# Altium PCB ESP32DIV2-Shield-pcb.PcbDoc
Units mm, origin at the board's own origin, x right, y up, seen from the top; angles counter-clockwise.
Board outline 53.59 x 100.96 mm, 2 copper layers (Top Layer, Bottom Layer); 34 components, 35 nets, 171 pads, 49 vias.
Unrouted connection lines stored in the file: 1.
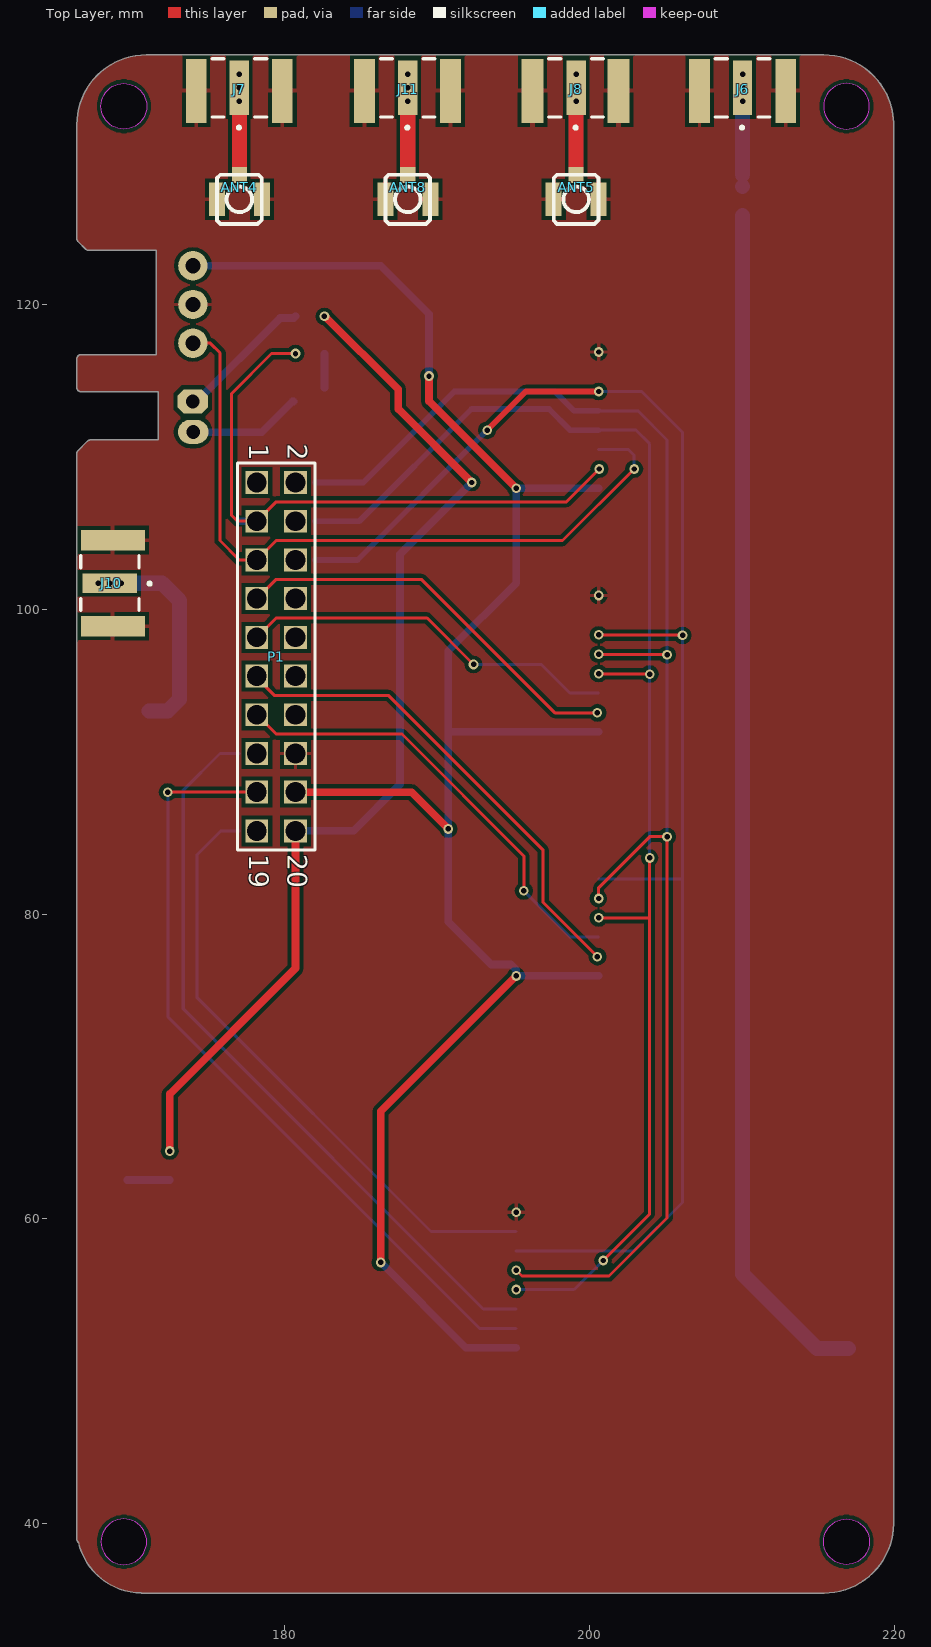
[diagram p0: Top Layer view]
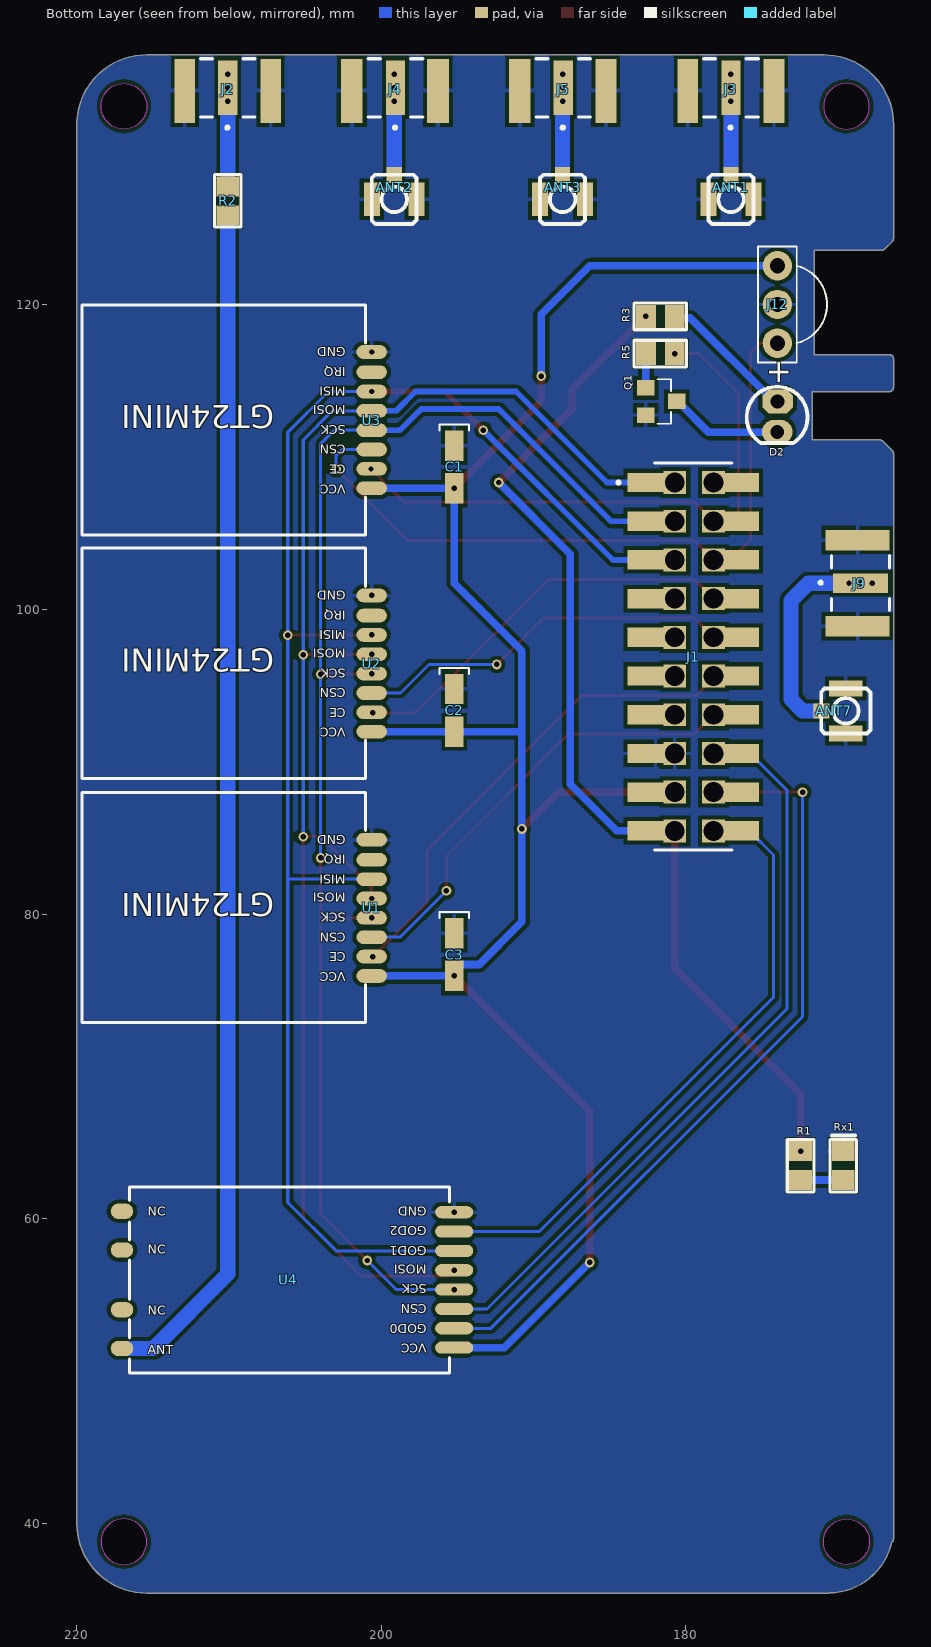
[diagram p1: Bottom Layer view, seen from below]

## Layer stack, top to bottom
Top Solder: solder mask 0.0102, Solder Resist, Dk 3.5
Top Layer: signal copper 0.0356
Dielectric 1: dielectric 0.32, FR-4, Dk 4.8
Bottom Layer: signal copper 0.0356
Bottom Solder: solder mask 0.0102, Solder Resist, Dk 3.5

## Board outline
166.37,38.989 166.37,110.236 cw(c166.624,110.236) 166.445,110.417 166.444,110.416 167.079,111.051 cw(c167.259,110.871) 167.259,111.125 171.704,111.125 171.704,114.3 166.624,114.3 cw(c166.624,114.554) 166.37,114.554 166.37,116.459 cw(c166.624,116.459) 166.624,116.713 171.577,116.713 171.577,123.571 167.132,123.571 cw(c167.132,123.825) 166.952,123.645 166.444,124.153 cw(c166.624,124.333) 166.37,124.333 166.37,131.826 cw(c170.942,131.826) 170.937,136.398 cw(c170.942,136.144) 170.942,136.398 215.392,136.398 cw(c215.392,136.144) 215.393,136.398 ccw(c215.392,131.826) 215.392,136.398 215.393,136.398 cw(c215.392,131.826) 219.952,132.157 cw(c219.71,132.08) 219.964,132.08 219.964,40.016 cw(c219.71,40.016) 219.964,40.011 ccw(c215.392,40.016) 219.964,40.016 219.964,40.011 cw(c215.392,40.016) 215.394,35.443 cw(c215.392,35.698) 215.392,35.443 170.666,35.443 cw(c170.666,35.698) 170.588,35.456 cw(c170.666,39.751) 166.481,38.779 cw(c166.624,38.989)
cut-out: 216.877,40.32 cw(c216.877,38.82) 218.377,38.82 cw(c216.877,38.82) 216.877,37.32 cw(c216.877,38.82) 215.377,38.82 cw(c216.877,38.82)
cut-out: 169.457,40.32 ccw(c169.457,38.82) 167.957,38.82 ccw(c169.457,38.82) 169.457,37.32 ccw(c169.457,38.82) 170.957,38.82 ccw(c169.457,38.82)
cut-out: 169.457,131.522 cw(c169.457,133.022) 167.957,133.022 cw(c169.457,133.022) 169.457,134.522 cw(c169.457,133.022) 170.957,133.022 cw(c169.457,133.022)
cut-out: 216.877,131.522 ccw(c216.877,133.022) 218.377,133.022 ccw(c216.877,133.022) 216.877,134.522 ccw(c216.877,133.022) 215.377,133.022 ccw(c216.877,133.022)

## Design rules (kind name [scope] priority, off if disabled: settings)
Clearance [All] p1: gap=0.254 ignorepadtopadclearanceinfootprint=FALSE except(0: Arc-Hole Track-Hole SMDPad-Hole THPad-Hole Via-Hole Fill-Hole Poly-Hole Region-Hole Text-Hole)
PolygonConnect [All] p1: connectstyle=Relief reliefconductorwidth=0.254 reliefentries=4 polygonreliefangle="90 Angle" airgapwidth=0.254
RoutingVias [All] p1: holewidth=0.711 width=1.27 viastyle="Through Hole" minholewidth=0.711 minwidth=1.27 maxholewidth=0.711 maxwidth=1.27
SolderMaskExpansion [All] p1: expansion=0.102 istentingtop=FALSE
Width [All] p1: maxlimit=1 minlimit=0.2 preferedwidth=0.5 minimp=50.000000 maximp=50.000000 favimp=50.000000
30 further rules are at their usual default settings.

## Components (designator, comment, footprint, x,y, rotation, side; value= is the part's Value field where it differs from the comment)
ANT1 "ANT U.FL" "U.FL SMD" 177.036,127.724 r0 bottom
ANT2 "ANT U.FL" "U.FL SMD" 199.134,127.724 r0 bottom
ANT3 "ANT U.FL" "U.FL SMD" 188.085,127.724 r0 bottom
ANT4 "ANT U.FL" "U.FL SMD" 177.04,127.724 r180 top
ANT5 "ANT U.FL" "U.FL SMD" 199.138,127.724 r180 top
ANT7 "ANT U.FL" "U.FL SMD" 170.307,93.345 r270 bottom
ANT8 "ANT U.FL" "U.FL SMD" 188.089,127.724 r180 top
C1 "Capacitor Tantalum SMD" "Tan 1206 (3216X18L) Size A" 200.66,116.089 r270 bottom value=10uf
C2 "Capacitor Tantalum SMD" "Tan 1206 (3216X18L) Size A" 200.66,100.114 r270 bottom value=10uf
C3 "Capacitor Tantalum SMD" "Tan 1206 (3216X18L) Size A" 200.66,84.085 r270 bottom value=10uf
D2 "LED IR-S" "LED 3mm" 173.99,112.649 r270 bottom
J1 "TSM-110-04-S-DV" SAMTEC_TSM-110-04-S-DV 179.513,96.901 r90 bottom locked
J2 "SMA" SAMTEC_SMA-J-P-H-ST-EM1 210.058,134.239 r0 bottom
J3 "SMA" SAMTEC_SMA-J-P-H-ST-EM1 177.038,134.239 r0 bottom
J4 "SMA" SAMTEC_SMA-J-P-H-ST-EM1 199.051,134.239 r0 bottom
J5 "SMA" SAMTEC_SMA-J-P-H-ST-EM1 188.045,134.239 r0 bottom
J6 "SMA" SAMTEC_SMA-J-P-H-ST-EM1 210.058,134.239 r180 top
J7 "SMA" SAMTEC_SMA-J-P-H-ST-EM1 177.038,134.239 r180 top
J8 "SMA" SAMTEC_SMA-J-P-H-ST-EM1 199.136,134.239 r180 top
J9 "SMA" SAMTEC_SMA-J-P-H-ST-EM1 168.529,101.727 r90 bottom
J10 "SMA" SAMTEC_SMA-J-P-H-ST-EM1 168.529,101.727 r270 top
J11 "SMA" SAMTEC_SMA-J-P-H-ST-EM1 188.087,134.239 r180 top
J12 "TSOP1838" TSOP1838 173.99,120.015 r90 bottom
P1 "Header 10X2" HDR2X10 178.181,108.331 r270 top locked
Q1 "SMD" SOT-23 181.605,113.649 r270 bottom
R1 "1k" "RES 0805" 172.466,64.456 r0 bottom
R2 "0R" "RES 0805" 210.058,127.762 r0 bottom
R3 "0R" "RES 0805" 182.621,119.232 r270 bottom
R5 "0R" "RES 0805" 180.721,116.792 r90 bottom
Rx1 "LED" L0805 169.672,64.456 r90 bottom
U1 "NRF24L01" NRF24L01_GT24MINI_MS 210.312,80.391 r0 bottom
U2 "NRF24L01" NRF24L01_GT24MINI_MS 210.312,96.42 r0 bottom
U3 "NRF24L01" NRF24L01_GT24MINI_MS 210.312,112.395 r0 bottom
U4 "CC1101" CC1101_SMD 205.999,56.007 r90 bottom

## Footprints (in the part's own frame and the unit in brackets; to place one, negate y for a bottom-side part, rotate by r counter-clockwise, add the part's x,y. Pads: shape width x height; smd on the part's side, far side on the other; paste and mask are expansions set on the pad)
CC1101_SMD [mm] "RF 433MHz, 10mW"
  oval 0.8x2.5 smd: 1(-4.45,-10.8) 2(-3.18,-10.8) 3(-1.91,-10.8) 4(-0.64,-10.8) 5(0.63,-10.8) 6(1.9,-10.8) 7(3.17,-10.8) 8(4.44,-10.8)
  oval 1x1.484 smd mask+0.1: 9(-4.5,11) 10(-1.96,11) 11(1.96,11) 12(4.5,11)
  silkscreen extent -6.1,-10.5 6.1,10.5, body extent -6,-10.4 6,10.4, height 1.3
HDR2X10 [mm] "Connector; Header; 10x2 Position"
  rect 1.5x1.5 hole 1.3: 1(0,0) 2(0,2.54) 3(2.54,0) 4(2.54,2.54) 5(5.08,0) 6(5.08,2.54) 7(7.62,0) 8(7.62,2.54) 9(10.16,0) 10(10.16,2.54) 11(12.7,0) 12(12.7,2.54) 13(15.24,0) 14(15.24,2.54) 15(17.78,0) 16(17.78,2.54) 17(20.32,0) 18(20.32,2.54) 19(22.86,0) 20(22.86,2.54)
  silkscreen extent -1.27,-1.27 24.13,3.81
L0805 [mm] "Body 2.0x1.3mm, IPC High Density"
  rect 1.3x1.5 smd: A(-1.9,0) K(0,0)
  silkscreen extent -2.68,-0.87 1.03,0.87, body extent -1.95,-0.63 0.05,0.62, height 0.68
"LED 3mm" [mm] "LED 3mm"
  oct 1.6x2 hole 0.9: A(-1,0.012)
  oval 1.6x2 hole 0.9: K(1,-0.012)
  silkscreen extent -1.96,-2.01 1.74,1.98, body extent -1.64,-1.54 1.57,1.76, height 4.98
NRF24L01_GT24MINI_MS [mm] "2.4GHz Transceiver MODULE, SMD"
  oval 2x0.9 smd mask+0.1: 1(-9.7,4.44) 2(-9.7,3.17) 3(-9.7,1.9) 4(-9.7,0.63) 5(-9.7,-0.64) 6(-9.7,-1.91) 7(-9.7,-3.18) 8(-9.7,-4.5)
  silkscreen extent -9.3,-7.6 9.3,7.5, body extent -9.2,-7.5 9.2,7.4, height 2.25
"RES 0805" [mm] "RES 0805"
  rect 1.5x1.3 smd: 1(0,0) 2(0,1.9)
  silkscreen extent -0.87,-0.77 0.87,2.68, body extent -0.63,-0.07 0.64,1.97, height 0.6
SAMTEC_SMA-J-P-H-ST-EM1 [mm]
  rect 1.27x3.6 smd: 1(0,0)
  rect 1.35x4.2 smd: 2_1(-2.825,0.2) 3_1(2.825,0.2)
  rect 1.35x4.2 smd far side: 2_2(-2.825,0.2) 3_2(2.825,0.2)
  silkscreen extent -1.8,-1.9 1.8,2.72, body extent -3.18,-11.42 3.17,1.91, height 3.55
SAMTEC_TSM-110-04-S-DV [mm]
  rect 1.27x3.68 smd: 01(11.43,2.475) 02(11.43,-2.475) 03(8.89,2.475) 04(8.89,-2.475) 05(6.35,2.475) 06(6.35,-2.475) 07(3.81,2.475) 08(3.81,-2.475) 09(1.27,2.475) 10(1.27,-2.475) 11(-1.27,2.475) 12(-1.27,-2.475) 13(-3.81,2.475) 14(-3.81,-2.475) 15(-6.35,2.475) 16(-6.35,-2.475) 17(-8.89,2.475) 18(-8.89,-2.475) 19(-11.43,2.475) 20(-11.43,-2.475)
  silkscreen extent -12.7,-2.54 12.7,5
SOT-23 [mil]
  rect 40x45 smd: 1(-35,-40) 2(35,-40) 3(0,40)
  silkscreen extent -58,-10 58,25, body extent -57,-51 57,51, height 55
"Tan 1206 (3216X18L) Size A" [mil]
  rect 78.7x47.2 smd: 1(210,215) 2(320.22,215)
  silkscreen extent 156,177 171,253, body extent 193,179 336,250, height 71
TSOP1838 [mil]
  round 76 hole 39.37: 1(-100,0) 2(0,0) 3(100,0)
  silkscreen extent -150,-128 150,50, body extent -118,-159 118,61, height 404
"U.FL SMD" [mm] "U.FL Antenna-Design:Ali Hafizi"
  rect 1x1.05 smd: 1(0.002,-0.8)
  rect 1.05x2.2 smd: 2(-1.475,0.8) 2(1.475,0.8)
  silkscreen extent -1.47,-0.8 1.47,2.44, body extent -1.73,-0.76 1.67,2.34, height 1.25

## Part data
ANT1 ANT2 ANT3 ANT4 ANT5 ANT7 ANT8: "Antenna", Ali Hafizi="Ali Hafizi"
D2: "LED"
J1: "Conn Unshrouded Header HDR 20 POS 2.54mm Solder ST SMD Tube", Package=None, Availability="In Stock", Check_prices=https://www.snapeda.com/parts/TSM-110-04-S-DV/Samtec/view-part/?ref=eda, MF=Samtec, MP=TSM-110-04-S-DV, Price=None, Purchase-URL=https://pricing.snapeda.com/search/part/TSM-110-04-S-DV/?ref=eda, SnapEDA_Link=https://www.snapeda.com/parts/TSM-110-04-S-DV/Samtec/view-part/?ref=snap
J2 J3 J4 J5 J6 J7 J8 J9 J10 J11: library part SMA-J-P-H-ST-EM1, "SMA Connector Jack, Female Socket 50Ohm Board Edge, End Launch Solder", Package=None, Availability=Unavailable, MF=Samtec, MP=SMA-J-P-H-ST-EM1, Price=None
J12: "IR Remote Receiver 38KHz 35m 3-Pin", Package=None, Check_prices=https://www.snapeda.com/parts/TSOP1838/Vishay/view-part/?ref=eda, MF=Vishay, MP=TSOP1838, SnapEDA_Link=https://www.snapeda.com/parts/TSOP1838/Vishay/view-part/?ref=snap
P1: "Header, 10-Pin, Dual row", LatestRevisionDate=17-Jul-2002, LatestRevisionNote="Re-released for DXP Platform.", Publisher="Altium Limited"
Q1: library part SMD-TRANSISTORS-NPN-25V-500MW(SOT-23), "Bipolar (BJT) Transistor NPN 25 V 500 mA 150MHz 300 mW Surface Mount SOT-23", Package=None, Availability="In Stock", Check_prices=https://www.snapeda.com/parts/S8050/Umwelt+Sensor+Teknik/view-part/?ref=eda, MF=UMW, MP=S8050, Price=None, Purchase-URL=https://pricing.snapeda.com/search/part/S8050/?ref=eda, SnapEDA_Link=https://www.snapeda.com/parts/S8050/Umwelt+Sensor+Teknik/view-part/?ref=snap
R1 R2 R3 R5: library part RES, "RESISTOR"
U1 U2 U3: library part NRF24L01_GT24MINI_MS, "2.4GHz Transceiver MODULE, SMD", DESIGN BY=A-SHAMSAEI, PARAM="1.9~3.6VIN, 12mA", PARAM2="2Mbit/s, –40~+85°C"
U4: library part CC1101_M_SMD, "RF 433MHz, 10mW"

## Via types
v1: diameter 0.635, hole 0.356, Top Layer to Bottom Layer, 49 vias

## Nets (pads, with @x,y where several pads share a name; then routed paths per layer and width w, separated by ;. In a path a pad name is that pad's centre, name@x,y a point inside that pad or via, vN(x,y) a via of type N, cw(c..) or ccw(c..) an arc to the next point about the centre after c; other vN are vias at no path point)
3v3: C1.2 C2.2 C3.2 J1.17 J12.3 P1.18 U1.1 U2.1 U3.1 U4.1 | length 132.5
  Top Layer w0.5: P1.18 188.341,88.011 v1(190.754,85.598) ; v1(186.309,57.15) 186.309,67.061 v1(195.199,75.951) ; v1(189.484,115.316) 189.484,113.67 v1(195.199,107.955)
  Bottom Layer w0.5: J12.3 186.309,122.555 189.484,119.38 v1(189.484,115.316) ; v1(186.309,57.15) 191.902,51.557 U4.1 ; U1.1 v1(195.199,75.951) 195.199,76.351 194.85,76.7 193.556,76.7 190.754,79.502 v1(190.754,85.598) 190.754,91.821 ; U2.1 C2.2 190.913,91.98 190.754,91.821 ; U3.1 v1(195.199,107.955) 195.199,101.727 190.754,97.282 190.754,91.821
+5v: J1.19 P1.20 R1.1 R3.1 | length 69.3
  Top Layer w0.5: v1(172.466,64.456) 172.466,68.199 180.721,76.454 P1.20 ; v1(182.621,119.232) 182.642,119.253 187.452,114.443 187.452,113.157 v1(192.278,108.331)
  Bottom Layer w0.5: P1.20 J1.19 184.531,85.471 187.579,88.519 187.579,103.632 v1(192.278,108.331)
ANT: R2.2 U4.9 | length 78.4
  Bottom Layer w1: R2.2 210.058,56.388 214.939,51.507 U4.9
GND: ANT1.2 ANT2.2 ANT3.2 ANT4.2 ANT5.2 ANT7.2 ANT8.2 C1.1 C2.1 C3.1 J1.15 J2.2_1 J2.2_2 J2.3_1 J2.3_2 J3.2_1 J3.2_2 J3.3_1 J3.3_2 J4.2_1 J4.2_2 J4.3_1 J4.3_2 J5.2_1 J5.2_2 J5.3_1 J5.3_2 J6.2_1 J6.2_2 J6.3_1 J6.3_2 J7.2_1 J7.2_2 J7.3_1 J7.3_2 J8.2_1 J8.2_2 J8.3_1 J8.3_2 J9.2_1 J9.2_2 J9.3_1 J9.3_2 J10.2_1 J10.2_2 J10.3_1 J10.3_2 J11.2_1 J11.2_2 J11.3_1 J11.3_2 J12.2 P1.16 Q1.2 Rx1.K U1.8 U2.8 U3.8 U4.8
  other v1: 195.199,60.447 200.612,100.92 200.612,116.895
IO3: J1.20 P1.19 U4.7 | length 40.1
  Bottom Layer w0.2: J1.20 175.833,85.471 174.244,83.882 174.244,74.549 189.616,59.177 U4.7
IO4: J1.14 P1.13 U1.3 | length 29.8
  Top Layer w0.2: P1.13 179.451,91.821 187.706,91.821 195.707,83.82 v1(195.707,81.534)
  Bottom Layer w0.2: v1(195.707,81.534) 198.75,78.491 U1.3
IO5: J1.16 P1.15 U4.3 | length 49
  Bottom Layer w0.2: J1.16 175.768,90.551 173.355,88.138 173.355,73.787 193.045,54.097 U4.3
IO6: J1.18 P1.17 U4.2 | length 51.9
  Top Layer w0.2: v1(172.339,88.011) P1.17
  Bottom Layer w0.2: v1(172.339,88.011) 172.339,73.279 192.791,52.827 U4.2
IO10: J1.02 P1.1
IO11: J1.01 P1.2 U1.5 U2.5 U3.5 U4.5 | length 100.7
  Top Layer w0.2: v1(195.199,56.642) 195.58,56.261 201.295,56.261 205.105,60.071 v1(205.105,85.09) 203.962,85.09 200.612,81.74 v1(200.612,81.031) ; v1(200.612,97.06) 200.628,97.044 205.089,97.044 v1(205.105,97.028)
  Bottom Layer w0.2: U3.5 200.617,113.03 200.622,113.035 203.195,113.035 205.105,111.125 v1(205.105,97.028) v1(205.105,85.09)
  Bottom Layer w0.381: J1.01 185.166,108.331 191.135,114.3 197.739,114.3 199.004,113.035 U3.5
IO12: J1.03 P1.4 U1.4 U2.4 U3.4 U4.4 | length 94
  Top Layer w0.2: v1(200.612,79.761) 203.962,79.761 ; v1(200.612,95.79) 200.628,95.774 203.946,95.774 v1(203.962,95.758) ; v1(200.914,57.277) 203.962,60.325 203.962,79.761 ; v1(203.962,83.693) 203.962,79.761
  Bottom Layer w0.2: v1(195.199,55.367) 199.004,55.367 v1(200.914,57.277) ; U3.4 203.068,111.765 203.962,110.871 v1(203.962,95.758) v1(203.962,83.693)
  Bottom Layer w0.381: J1.03 184.912,105.791 192.278,113.157 197.358,113.157 198.75,111.765 U3.4
IO13: J1.05 P1.6 U1.6 U2.6 U3.6 U4.6 | length 103.6
  Top Layer w0.2: v1(200.612,98.33) 200.628,98.314 206.105,98.314 v1(206.121,98.298)
  Top Layer w0.381: v1(193.294,111.76) 195.839,114.305 v1(200.612,114.305)
  Bottom Layer w0.2: U4.6 202.941,57.907 206.121,61.087 206.121,82.301 ; U1.6 206.121,82.301 ; v1(200.612,114.305) 203.449,114.305 206.121,111.633 v1(206.121,98.298) 206.121,82.301
  Bottom Layer w0.381: J1.05 184.785,103.251 v1(193.294,111.76)
IO14: J1.04 P1.3 R5.1 U3.2 | length 40.3
  Top Layer w0.2: v1(180.721,116.792) 179.149,116.792 176.53,114.173 176.53,106.172 176.911,105.791 P1.3 178.435,105.791 178.435,106.045 179.451,107.061 198.501,107.061 v1(200.66,109.22)
  Bottom Layer w0.5: J1.04 P1.3
IO15: J1.12 P1.11 U1.2 | length 32.1
  Top Layer w0.2: P1.11 178.181,95.504 179.324,94.361 186.817,94.361 196.977,84.201 196.977,80.772 v1(200.533,77.216)
IO21: J1.06 J12.1 P1.5 U3.3 | length 48
  Top Layer w0.2: J12.1 175.133,117.475 175.768,116.84 175.768,104.521 177.038,103.251 P1.5 ; P1.5@178.308,103.251 178.308,103.378 179.451,104.521 198.247,104.521 v1(202.946,109.22)
  Top Layer w0.5: P1.5 P1.5@178.308,103.251
  Bottom Layer w0.2: U3.3 202.56,110.495 202.946,110.109 v1(202.946,109.22)
IO47: J1.08 P1.7 U2.2 | length 26.5
  Top Layer w0.2: P1.7 179.451,101.981 188.976,101.981 197.739,93.218 v1(200.533,93.218)
IO48: J1.10 P1.9 U2.3 | length 25.1
  Top Layer w0.2: P1.9 178.308,98.171 178.308,98.298 179.451,99.441 189.357,99.441 v1(192.405,96.393)
  Bottom Layer w0.2: v1(192.405,96.393) 196.85,96.393 198.723,94.52 U2.3
NetANT1_1: ANT1.1 J3.1 | length 5.7
  Bottom Layer w1: ANT1.1 J3.1
NetANT2_1: ANT2.1 J4.1 | length 5.8
  Bottom Layer w1: J4.1 199.136,134.154 ANT2.1
NetANT3_1: ANT3.1 J5.1 | length 5.7
  Bottom Layer w1: J5.1 188.087,134.197 ANT3.1
NetANT4_1: ANT4.1 J7.1 | length 5.7
  Top Layer w1: ANT4.1 v1(177.038,134.239)
  other v1: 177.038,133.35 177.038,135.128
NetANT5_1: ANT5.1 J8.1 | length 5.7
  Top Layer w1: ANT5.1 v1(199.136,134.239)
  other v1: 199.136,133.35 199.136,135.128
NetANT6_1: J9.1 | length 4.9
  Bottom Layer w1: J9.1 171.831,101.727 ; 171.958,101.727 173.101,100.584
NetANT7_1: ANT7.1 J10.1 | length 8.8
  Bottom Layer w1: ANT7.1 172.337,93.343 173.101,94.107 173.101,100.584
  other v1: 167.767,101.727 168.529,101.727 169.291,101.727
NetANT8_1: ANT8.1 J11.1 | length 5.7
  Top Layer w1: ANT8.1 v1(188.087,134.239)
  other v1: 188.087,133.35 188.087,135.128
NetD2_A: D2.A R3.2 | length 9.1
  Bottom Layer w0.5: D2.A 174.228,113.649 179.705,119.126 180.615,119.126 R3.2
NetD2_K: D2.K Q1.3 | length 7.4
  Bottom Layer w0.5: D2.K 174.018,111.633 178.51,111.633 180.526,113.649 Q1.3
NetJ2_1: J2.1 R2.1 | length 5.7
  Bottom Layer w1: 210.058,128.524 J2.1
NetJ6_1: J6.1
  other v1: 210.058,133.35 210.058,134.239 210.058,135.128
NetQ1_1: Q1.1 R5.2 | length 2.3
  Bottom Layer w0.5: Q1.1 R5.2
NetR1_2: R1.2 Rx1.A | length 2.8
  Bottom Layer w0.5: Rx1.A R1.2
RX_0: J1.09 P1.10
SCL: J1.11 P1.12
SDA: J1.13 P1.14
TX_0: J1.07 P1.8
pads on no net: U1.7 U2.7 U3.7 U4.10 U4.11 U4.12

## Polygon pours and split planes (outlines as drawn)
GND on Top Layer "GND_L01_P008" (solid, pour order 8): 166.37,38.989 166.37,110.236 cw(c166.624,110.236) 166.445,110.417 166.444,110.416 167.079,111.051 cw(c167.259,110.871) 167.259,111.125 171.704,111.125 171.704,114.3 166.624,114.3 cw(c166.624,114.554) 166.37,114.554 166.37,116.459 cw(c166.624,116.459) 166.624,116.713 171.577,116.713 171.577,123.571 167.132,123.571 cw(c167.132,123.825) 166.952,123.645 166.444,124.153 cw(c166.624,124.333) 166.37,124.333 166.37,131.826 cw(c170.942,131.826) 170.937,136.398 cw(c170.942,136.144) 170.942,136.398 215.392,136.398 cw(c215.392,136.144) 215.393,136.398 ccw(c215.392,131.826) 215.392,136.398 215.393,136.398 cw(c215.392,131.826) 219.952,132.157 cw(c219.71,132.08) 219.964,132.08 219.964,40.016 cw(c219.71,40.016) 219.964,40.011 ccw(c215.392,40.016) 219.964,40.016 219.964,40.011 cw(c215.392,40.016) 215.394,35.443 cw(c215.392,35.698) 215.392,35.443 170.666,35.443 cw(c170.666,35.698) 170.588,35.456 cw(c170.666,39.751) 166.481,38.779 cw(c166.624,38.989)
GND on Bottom Layer "GND_L02_P010" (solid, pour order 10): 166.37,38.989 166.37,110.236 cw(c166.624,110.236) 166.445,110.417 166.444,110.416 167.079,111.051 cw(c167.259,110.871) 167.259,111.125 171.704,111.125 171.704,114.3 166.624,114.3 cw(c166.624,114.554) 166.37,114.554 166.37,116.459 cw(c166.624,116.459) 166.624,116.713 171.577,116.713 171.577,123.571 167.132,123.571 cw(c167.132,123.825) 166.952,123.645 166.444,124.153 cw(c166.624,124.333) 166.37,124.333 166.37,131.826 cw(c170.942,131.826) 170.937,136.398 cw(c170.942,136.144) 170.942,136.398 215.392,136.398 cw(c215.392,136.144) 215.393,136.398 ccw(c215.392,131.826) 215.392,136.398 215.393,136.398 cw(c215.392,131.826) 219.952,132.157 cw(c219.71,132.08) 219.964,132.08 219.964,40.016 cw(c219.71,40.016) 219.964,40.011 ccw(c215.392,40.016) 219.964,40.016 219.964,40.011 cw(c215.392,40.016) 215.394,35.443 cw(c215.392,35.698) 215.392,35.443 170.666,35.443 cw(c170.666,35.698) 170.588,35.456 cw(c170.666,39.751) 166.481,38.779 cw(c166.624,38.989)

## Silkscreen, mask and mechanical layers (free items; w line width, h text height)
Mechanical 1:
  lines w0.254: 163.195,37.338 163.703,35.814 ; 163.195,134.747 163.703,136.271 ; 163.449,35.814 163.957,35.814 ; 163.449,136.271 163.957,136.271 ; 163.703,77.384 163.703,35.814 ; 163.703,94.701 163.703,136.271 ; 164.211,37.338 163.703,35.814 ; 164.211,134.747 163.703,136.271 ; 166.75,138.684 166.752,139.192 ; 168.274,138.426 166.751,138.938 ; 168.276,139.442 166.751,138.938 ; 185.27,138.894 166.751,138.938 ; 201.318,138.855 219.837,138.811 ; 218.312,138.307 219.837,138.811 ; 218.314,139.323 219.837,138.811 ; 219.836,138.557 219.838,139.065 ; 176.973,84.179 182.053,84.179 182.053,109.579 176.973,109.579 176.973,84.179
  lines w0.508: 166.624,38.989 166.624,110.236 167.259,110.871 171.958,110.871 171.958,114.554 168.275,114.554 166.624,114.554 166.624,116.459 167.132,116.459 171.831,116.459 171.831,123.825 167.132,123.825 166.624,124.333 166.624,131.826 cw(c170.942,131.826) 170.942,136.144 215.392,136.144 cw(c215.392,131.826) 219.71,131.826 ; 166.624,39.751 ccw(c170.666,39.751) 170.666,35.709 ; 170.666,35.698 179.498,35.698 206.306,35.698 215.392,35.698 ccw(c215.392,40.016) 219.71,40.016 219.71,132.08
  text "53.086 (mm)" at 185.522,137.979 h1.52 r359.86
  text "100.457 (mm)" at 164.617,77.638 h1.52 r90

## Text inside footprints (layer, text, board x,y; h text height)
D2: Bottom Overlay "+" at 173.228,114.681 h1.52 r270
J2: Mechanical 13 "PCB EDGE" at 214.362,135.941 h0.61 r180
J3: Mechanical 13 "PCB EDGE" at 181.342,135.941 h0.61 r180
J4: Mechanical 13 "PCB EDGE" at 203.355,135.941 h0.61 r180
J5: Mechanical 13 "PCB EDGE" at 192.349,135.941 h0.61 r180
J6: Mechanical 13 "PCB EDGE" at 205.754,135.941 h0.61 r180
J7: Mechanical 13 "PCB EDGE" at 172.734,135.941 h0.61 r180
J8: Mechanical 13 "PCB EDGE" at 194.832,135.941 h0.61 r180
J9: Mechanical 13 "PCB EDGE" at 166.827,106.031 h0.61 r270
J10: Mechanical 13 "PCB EDGE" at 166.827,97.423 h0.61 r270
J11: Mechanical 13 "PCB EDGE" at 183.783,135.941 h0.61 r180
P1: Top Overlay "20" at 180.213,83.947 h1.27 r270; Top Overlay "19" at 177.673,83.947 h1.27 r270; Top Overlay "1" at 177.673,110.871 h1.27 r270; Top Overlay "2" at 180.213,110.871 h1.27 r270
U1: Bottom Overlay "GT24MINI" at 207.012,81.391 h1.5 r180; Bottom Overlay "GND" at 202.312,85.196 h0.6 r180; Bottom Overlay "IRQ" at 202.312,83.896 h0.6 r180; Bottom Overlay "MISI" at 202.312,82.596 h0.6 r180; Bottom Overlay "MOSI" at 202.312,81.396 h0.6 r180; Bottom Overlay "SCK" at 202.312,80.096 h0.6 r180; Bottom Overlay "CSN" at 202.312,78.796 h0.6 r180; Bottom Overlay "CE" at 202.312,77.496 h0.6 r180; Bottom Overlay "VCC" at 202.312,76.196 h0.6 r180
U2: Bottom Overlay "GT24MINI" at 207.012,97.42 h1.5 r180; Bottom Overlay "GND" at 202.312,101.225 h0.6 r180; Bottom Overlay "IRQ" at 202.312,99.925 h0.6 r180; Bottom Overlay "MISI" at 202.312,98.625 h0.6 r180; Bottom Overlay "MOSI" at 202.312,97.425 h0.6 r180; Bottom Overlay "SCK" at 202.312,96.125 h0.6 r180; Bottom Overlay "CSN" at 202.312,94.825 h0.6 r180; Bottom Overlay "CE" at 202.312,93.525 h0.6 r180; Bottom Overlay "VCC" at 202.312,92.225 h0.6 r180
U3: Bottom Overlay "GT24MINI" at 207.012,113.395 h1.5 r180; Bottom Overlay "GND" at 202.312,117.2 h0.6 r180; Bottom Overlay "IRQ" at 202.312,115.9 h0.6 r180; Bottom Overlay "MISI" at 202.312,114.6 h0.6 r180; Bottom Overlay "MOSI" at 202.312,113.4 h0.6 r180; Bottom Overlay "SCK" at 202.312,112.1 h0.6 r180; Bottom Overlay "CSN" at 202.312,110.8 h0.6 r180; Bottom Overlay "CE" at 202.312,109.5 h0.6 r180; Bottom Overlay "VCC" at 202.312,108.2 h0.6 r180
U4: Bottom Overlay "NC" at 215.299,60.207 h0.6; Bottom Overlay "NC" at 215.299,57.707 h0.6; Bottom Overlay "NC" at 215.299,53.707 h0.6; Bottom Overlay "ANT" at 215.299,51.107 h0.6; Bottom Overlay "GND" at 196.999,60.807 h0.6 r180; Bottom Overlay "GOD2" at 196.999,59.507 h0.6 r180; Bottom Overlay "GOD1" at 196.999,58.207 h0.6 r180; Bottom Overlay "MOSI" at 196.999,57.007 h0.6 r180; Bottom Overlay "SCK" at 196.999,55.707 h0.6 r180; Bottom Overlay "CSN" at 196.999,54.407 h0.6 r180; Bottom Overlay "GOD0" at 196.999,53.107 h0.6 r180; Bottom Overlay "VCC" at 196.999,51.807 h0.6 r180